# Altium PCB LEDCube.PcbDoc
Units mil, origin at the board's own origin, x right, y up, seen from the top; angles counter-clockwise.
Board outline 5865.01 x 3595.01 mil, 2 copper layers (Top Layer, Bottom Layer); 85 components, 156 nets, 364 pads, 4 vias.
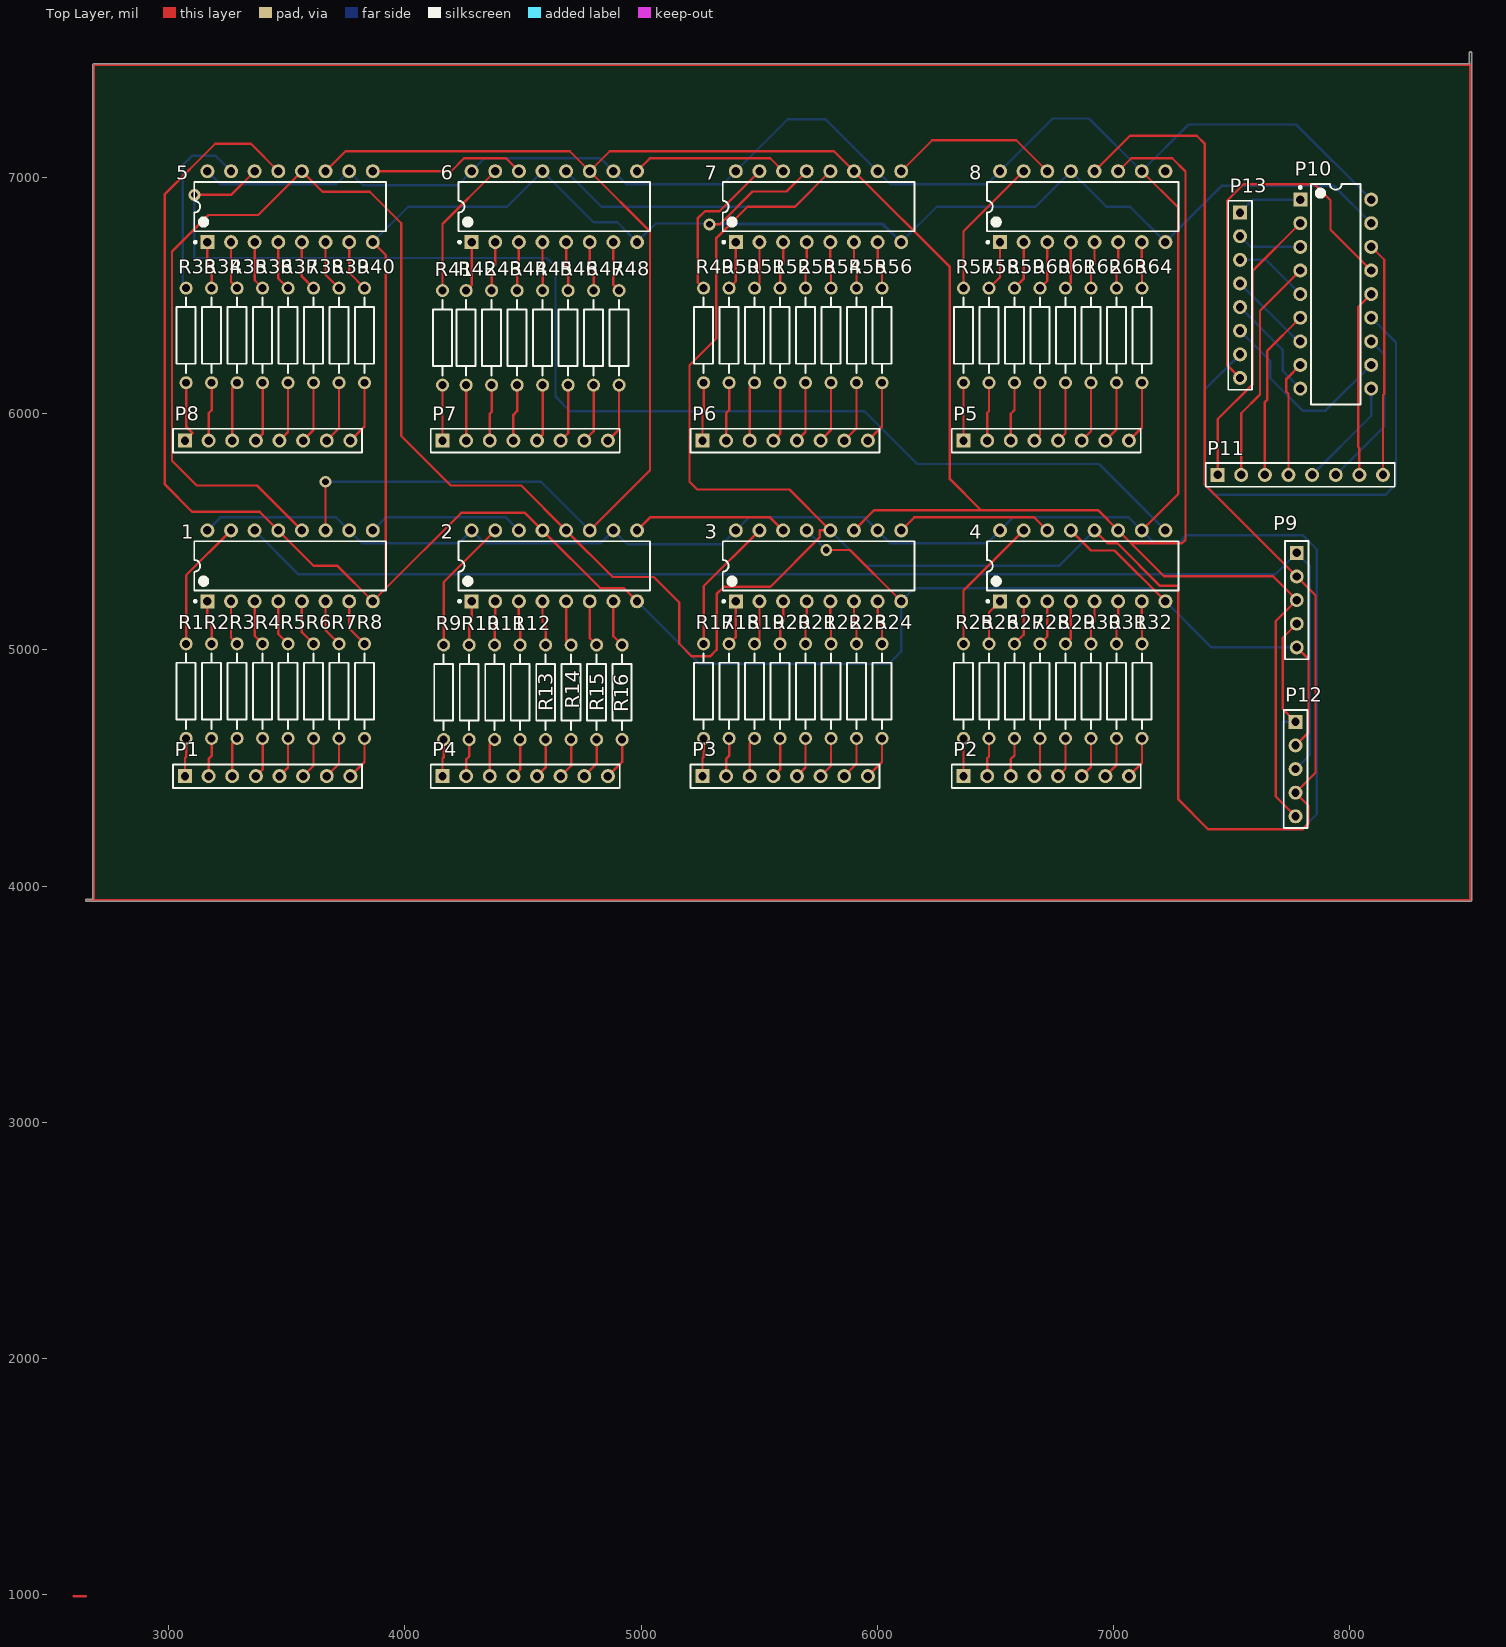
[diagram p0: Top Layer view]
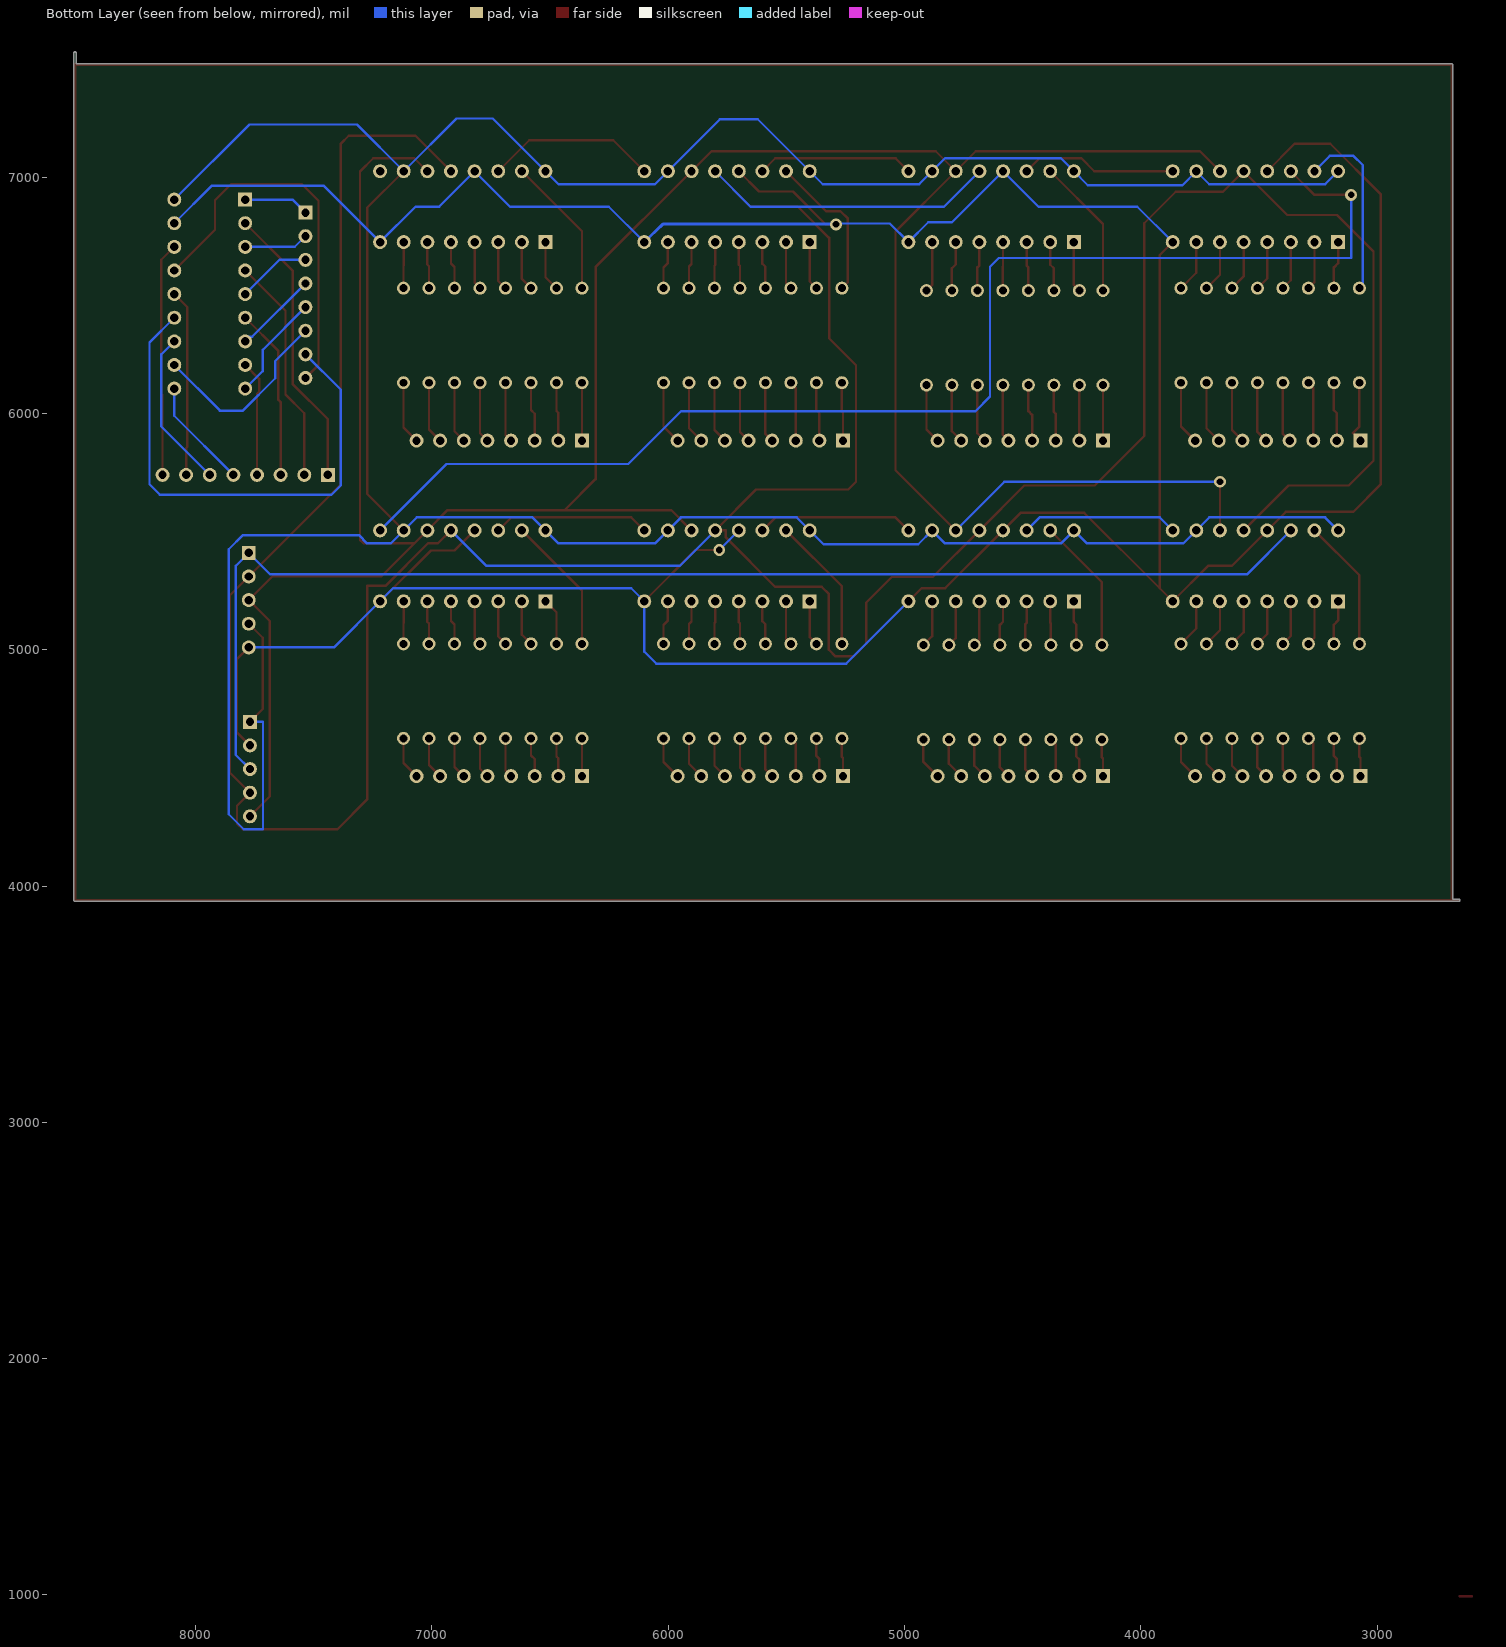
[diagram p1: Bottom Layer view, seen from below]

## Layer stack, top to bottom
Top Solder: solder mask 0.4, Solder Resist, Dk 3.5
Top Layer: signal copper 1.4
Dielectric 1: dielectric 12.6, FR-4, Dk 4.8
Bottom Layer: signal copper 1.4
Bottom Solder: solder mask 0.4, Solder Resist, Dk 3.5

## Board outline
2655,3934.99 cw(c2655,3940) 2655,3945.01 2679.99,3945.01 2679.99,7475 cw(c2685,7475) 2685,7480.02 8504.99,7480.02 8504.99,7525 cw(c8510,7525) 8515.01,7525 8515.01,3940 cw(c8510,3940) 8510,3934.99

## Design rules (kind name [scope] priority, off if disabled: settings)
Clearance [All] p1: gap=20
PolygonConnect [All] p1: connectstyle=Relief reliefconductorwidth=10 reliefentries=4 polygonreliefangle="90 Angle" airgapwidth=10
RoomDefinition LEDCube [InComponentClass('LEDCube')] p1: confinementstyle=ConfineIn formatcopy=TRUE lockcomponents=FALSE outline 0,0 2000,0 2000,1000 0,1000
RoutingVias [All] p1: holewidth=28 width=50 viastyle="Through Hole" minholewidth=28 minwidth=50 maxholewidth=28 maxwidth=50
SolderMaskExpansion [All] p1: expansion=4
Width [All] p1: maxlimit=10 minlimit=10 preferedwidth=10
30 further rules are at their usual default settings.

## Components (designator, comment, footprint, x,y, rotation, side; value= is the part's Value field where it differs from the comment)
1 "74HC595" DIP-16 3515,5355 r90 top
2 "74HC595" DIP-16 4633.1,5355 r90 top
3 "74HC595" DIP-16 5751.19,5355 r90 top
4 "74HC595" DIP-16 6869.29,5355 r90 top
5 "74HC595" DIP-16 3515,6875 r90 top
6 "74HC595" DIP-16 4633.1,6875 r90 top
7 "74HC595" DIP-16 5751.19,6875 r90 top
8 "74HC595" DIP-16 6869.29,6875 r90 top
P1 "Header 8" HDR1X8 3070,4465 r0 top
P2 "Header 8" HDR1X8 6365,4465 r0 top
P3 "Header 8" HDR1X8 5260,4465 r0 top
P4 "Header 8" HDR1X8 4160,4465 r0 top
P5 "Header 8" HDR1X8 6365,5885 r0 top
P6 "Header 8" HDR1X8 5260,5885 r0 top
P7 "Header 8" HDR1X8 4160,5885 r0 top
P8 "Header 8" HDR1X8 3070,5885 r0 top
P9 "Header 5" HDR1X5 7775,5410 r270 top
P10 "Darlinton transistorLeftToAVR" DIP-18 7940,6505 r0 top
P11 "Cube Layer" HDR1X8 7440,5740 r0 top
P12 "Matrix" HDR1X5 7770,4695 r270 top
P13 "AVR" HDR1X8 7535,6850 r270 top
R1 "Res2" AXIAL-0.4 3074.88,4825 r270 top
R2 "Res2" AXIAL-0.4 3182.76,4825 r270 top
R3 "Res2" AXIAL-0.4 3290.63,4825 r270 top
R4 "Res2" AXIAL-0.4 3398.5,4825 r270 top
R5 "Res2" AXIAL-0.4 3506.38,4825 r270 top
R6 "Res2" AXIAL-0.4 3614.25,4825 r270 top
R7 "Res2" AXIAL-0.4 3722.13,4825 r270 top
R8 "Res2" AXIAL-0.4 3830,4825 r270 top
R9 "Res2" AXIAL-0.4 4164.88,4820 r270 top
R10 "Res2" AXIAL-0.4 4272.76,4820 r270 top
R11 "Res2" AXIAL-0.4 4380.63,4820 r270 top
R12 "Res2" AXIAL-0.4 4488.5,4820 r270 top
R13 "Res2" AXIAL-0.4 4596.38,4820 r270 top
R14 "Res2" AXIAL-0.4 4704.25,4820 r270 top
R15 "Res2" AXIAL-0.4 4812.13,4820 r270 top
R16 "Res2" AXIAL-0.4 4920,4820 r270 top
R17 "Res2" AXIAL-0.4 5264.88,4825 r270 top
R18 "Res2" AXIAL-0.4 5372.76,4825 r270 top
R19 "Res2" AXIAL-0.4 5480.63,4825 r270 top
R20 "Res2" AXIAL-0.4 5588.5,4825 r270 top
R21 "Res2" AXIAL-0.4 5696.38,4825 r270 top
R22 "Res2" AXIAL-0.4 5804.25,4825 r270 top
R23 "Res2" AXIAL-0.4 5912.13,4825 r270 top
R24 "Res2" AXIAL-0.4 6020,4825 r270 top
R25 "Res2" AXIAL-0.4 6364.88,4825 r270 top
R26 "Res2" AXIAL-0.4 6472.76,4825 r270 top
R27 "Res2" AXIAL-0.4 6580.63,4825 r270 top
R28 "Res2" AXIAL-0.4 6688.5,4825 r270 top
R29 "Res2" AXIAL-0.4 6796.38,4825 r270 top
R30 "Res2" AXIAL-0.4 6904.25,4825 r270 top
R31 "Res2" AXIAL-0.4 7012.13,4825 r270 top
R32 "Res2" AXIAL-0.4 7120,4825 r270 top
R33 "Res2" AXIAL-0.4 3074.88,6330 r90 top
R34 "Res2" AXIAL-0.4 3182.76,6330 r90 top
R35 "Res2" AXIAL-0.4 3290.63,6330 r90 top
R36 "Res2" AXIAL-0.4 3398.5,6330 r90 top
R37 "Res2" AXIAL-0.4 3506.38,6330 r90 top
R38 "Res2" AXIAL-0.4 3614.25,6330 r90 top
R39 "Res2" AXIAL-0.4 3722.13,6330 r90 top
R40 "Res2" AXIAL-0.4 3830,6330 r90 top
R41 "Res2" AXIAL-0.4 4160,6320 r90 top
R42 "Res2" AXIAL-0.4 4259.88,6320 r90 top
R43 "Res2" AXIAL-0.4 4367.76,6320 r90 top
R44 "Res2" AXIAL-0.4 4475.63,6320 r90 top
R45 "Res2" AXIAL-0.4 4583.5,6320 r90 top
R46 "Res2" AXIAL-0.4 4691.38,6320 r90 top
R47 "Res2" AXIAL-0.4 4799.25,6320 r90 top
R48 "Res2" AXIAL-0.4 4907.13,6320 r90 top
R49 "Res2" AXIAL-0.4 5264.88,6330 r90 top
R50 "Res2" AXIAL-0.4 5372.76,6330 r90 top
R51 "Res2" AXIAL-0.4 5480.63,6330 r90 top
R52 "Res2" AXIAL-0.4 5588.5,6330 r90 top
R53 "Res2" AXIAL-0.4 5696.38,6330 r90 top
R54 "Res2" AXIAL-0.4 5804.25,6330 r90 top
R55 "Res2" AXIAL-0.4 5912.13,6330 r90 top
R56 "Res2" AXIAL-0.4 6020,6330 r90 top
R57 "Res2" AXIAL-0.4 6364.88,6330 r90 top
R58 "Res2" AXIAL-0.4 6472.76,6330 r90 top
R59 "Res2" AXIAL-0.4 6580.63,6330 r90 top
R60 "Res2" AXIAL-0.4 6688.5,6330 r90 top
R61 "Res2" AXIAL-0.4 6796.38,6330 r90 top
R62 "Res2" AXIAL-0.4 6904.25,6330 r90 top
R63 "Res2" AXIAL-0.4 7012.13,6330 r90 top
R64 "Res2" AXIAL-0.4 7120,6330 r90 top

## Footprints (in the part's own frame and the unit in brackets; to place one, negate y for a bottom-side part, rotate by r counter-clockwise, add the part's x,y. Pads: shape width x height; smd on the part's side, far side on the other; paste and mask are expansions set on the pad)
AXIAL-0.4 [mm] "Axial Device, Thru-Hole; 2 Leads; 0.4 in Pin Spacing"
  round 1.4 hole 0.85: 1(-5.08,0) 2(5.08,0)
  silkscreen extent -4.06,-1.02 4.06,1.02
DIP-16 [mm] "DIP; 16 Leads; Row Spacing 7.62 mm; Pitch 2.54 mm"
  rect 1.5x1.5 hole 0.9: 1(-3.81,8.89)
  round 1.5 hole 0.9: 2(-3.81,6.35) 3(-3.81,3.81) 4(-3.81,1.27) 5(-3.81,-1.27) 6(-3.81,-3.81) 7(-3.81,-6.35) 8(-3.81,-8.89) 9(3.81,-8.89) 10(3.81,-6.35) 11(3.81,-3.81) 12(3.81,-1.27) 13(3.81,1.27) 14(3.81,3.81) 15(3.81,6.35) 16(3.81,8.89)
  silkscreen extent -3.93,-10.3 2.65,10.31, body extent -3.6,-10.28 3.6,10.28, height 5.08
DIP-18 [mm] "DIP; 18 Leads; Row Spacing 7.62 mm; Pitch 2.54 mm"
  rect 1.5x1.5 hole 0.9: 1(-3.81,10.16)
  round 1.5 hole 0.9: 2(-3.81,7.62) 3(-3.81,5.08) 4(-3.81,2.54) 5(-3.81,0) 6(-3.81,-2.54) 7(-3.81,-5.08) 8(-3.81,-7.62) 9(-3.81,-10.16) 10(3.81,-10.16) 11(3.81,-7.62) 12(3.81,-5.08) 13(3.81,-2.54) 14(3.81,0) 15(3.81,2.54) 16(3.81,5.08) 17(3.81,7.62) 18(3.81,10.16)
  silkscreen extent -3.93,-11.85 2.65,11.85, body extent -3.6,-11.8 3.6,11.8, height 5.08
HDR1X5 [mm] "Connector; Header; 5 Position"
  rect 1.5x1.5 hole 0.9: 1(0,0)
  round 1.5 hole 0.9: 2(2.54,0) 3(5.08,0) 4(7.62,0) 5(10.16,0)
  silkscreen extent -1.27,-1.27 11.43,1.27
HDR1X8 [mm] "Connector; Header; 8 Position"
  rect 1.5x1.5 hole 0.9: 1(0,0)
  round 1.5 hole 0.9: 2(2.54,0) 3(5.08,0) 4(7.62,0) 5(10.16,0) 6(12.7,0) 7(15.24,0) 8(17.78,0)
  silkscreen extent -1.27,-1.27 19.05,1.27

## Part data
1 2 3 4 5 6 7 8: library part Component_1
P1 P2 P3 P4 P5 P6 P7 P8: "Header, 8-Pin"
P9: "Header, 5-Pin"
P10: library part "Header 9X2", "Header, 9-Pin, Dual row"
P11 P13: library part "Header 8", "Header, 8-Pin"
P12: library part "Header 5", "Header, 5-Pin"
R1 R2 R3 R4 R5 R6 R7 R8 R9 R10 R11 R12 R13 R14 R15 R16 R17 R18 R19 R20 R21 R22 R23 R24 R25 R26 R27 R28 R29 R30 R31 R32 R33 R34 R35 R36 R37 R38 R39 R40 R41 R42 R43 R44 R45 R46 R47 R48 R49 R50 R51 R52 R53 R54 R55 R56 R57 R58 R59 R60 R61 R62 R63 R64: "Resistor"

## Via types
v1: diameter 50, hole 28, Top Layer to Bottom Layer, 4 vias

## Nets (pads, with @x,y where several pads share a name; then routed paths per layer and width w, separated by ;. In a path a pad name is that pad's centre, name@x,y a point inside that pad or via, vN(x,y) a via of type N, cw(c..) or ccw(c..) an arc to the next point about the centre after c; other vN are vias at no path point)
Net1_1: 1.1 R2.1 | length 187.4
  Top Layer w10: 1.1 3165,5123.76 3182.76,5106 R2.1
Net1_2: 1.2 R3.1 | length 190.6
  Top Layer w10: 1.2 3265,5050.63 R3.1
Net1_3: 1.3 R4.1 | length 193.9
  Top Layer w10: 1.3 3365,5058.5 R4.1
Net1_4: 1.4 R5.1 | length 197.1
  Top Layer w10: 1.4 3465,5066.38 R5.1
Net1_5: 1.5 R6.1 | length 200.4
  Top Layer w10: 1.5 3565,5074.25 R6.1
Net1_6: 1.6 R7.1 | length 203.7
  Top Layer w10: 1.6 3665,5082.13 R7.1
Net1_7: 1.7 R8.1 | length 206.9
  Top Layer w10: 1.7 3765,5090 R8.1
Net1_8: 1.8 1.13 2.8 2.13 3.8 3.13 4.8 4.13 5.8 5.13 6.8 6.13 7.8 7.13 8.8 8.13 P9.5 P10.17 P12.2 | length 16913
  Top Layer w10: 5.13 3349,7141 3198,7141 2985,6928 2985,5699 3100,5584 3386,5584 1.13 3615,5355 3715,5355 1.8 3920,5260 ; 5.8 3920,6670 3920,5260 ; 2.8 4928.1,5260 4828.1,5260 2.13 4509.1,5579 4239,5579 3920,5260 ; v1(5290,6800) 5333,6800 5472,6939 5615.19,6939 7.13 ; v1(5784.19,5422) 5884.19,5422 3.8 ; 4.13 6904.29,5420 7004.29,5420 4.8 ; P12.2 7824.53,4649.53 7824.53,4960.47 P9.5
  Bottom Layer w10: 5.8 4015,6875 4433.1,6875 6.13 4799.1,6809 4899.1,6809 6.8 5062.1,6804 6022.19,6804 6022.19,6800 ; 2.8 5247.1,4941 6050,4941 6101.19,4992.19 3.8 6156.19,5260 7164.29,5260 4.8 7414.29,5010 P9.5 ; v1(5290,6800) 6022.19,6800 ; 3.13 v1(5784.19,5422) ; P10.17 7932.21,6962.79 7457.07,6962.79 8.8 7069.29,6875 6969.29,6875 8.13 6669.29,6875 6251.19,6875 7.8 ; 6022.19,6800 6026.19,6800 7.8 ; 6022.19,6800 7.8
Net1_9: 1.9 2.14 | length 663.7
  Bottom Layer w10: 1.9 3920,5560 4428.1,5560 2.14
Net1_10: 1.10 1.16 2.10 2.16 3.10 3.16 4.10 4.16 5.10 5.16 6.10 6.16 7.10 7.16 8.10 8.16 P9.4 P10.18 P12.1 | length 14728.7
  Top Layer w10: 4.10 7274,5659.71 7274,6870.29 8.10 ; P12.1 7716,4749 7716,5051 P9.4
  Bottom Layer w10: 1.16 3220,5560 3710,5560 1.10 3820,5450 4228.1,5450 2.16 4338.1,5450 4828.1,5450 2.10 4942.1,5446 5342.19,5446 3.16 5456.19,5560 5946.19,5560 3.10 6056.19,5450 6464.29,5450 4.16 6574.29,5560 7064.29,5560 4.10 7174.29,5450 7274,5450 7309,5485 7800,5485 7860,5425 7860,4304 7796,4240 7715,4240 7715,4695 P12.1 ; 5.16 3220,6970 3710,6970 5.10 3824,6966 4224.1,6966 6.16 4338.1,7080 4828.1,7080 6.10 4938.1,6970 5346.19,6970 7.16 5621.19,7245 5781.19,7245 7.10 6056.19,6970 6464.29,6970 8.16 6742.29,7248 6896.29,7248 8.10 7317.29,7223 7772,7223 P10.18
Net1_11: 1.11 2.11 3.11 4.11 5.11 6.11 7.11 8.11 P9.3 P12.5 | length 12352.9
  Top Layer w10: 1.11 v1(3665,5711) ; 5.11 3749.53,7109.53 4698.57,7109.53 6.11 ; 2.11 5038,5759.9 5038,6770.1 6.11 ; 3.11 5987.19,5591 6438,5591 ; 8.11 7074.29,7080 7248,7080 7304,7024 7304,5465 7289.31,5450.31 7073.97,5450.31 ; P12.5 7686,4379 7686,5121 P9.3 7674,5311 7213.29,5311 7073.97,5450.31 ; 6.11 4867.62,7109.53 5816.66,7109.53 7.11 6307,6619.19 6307,5722 6438,5591 ; 6438,5591 6933.29,5591 4.11 7073.97,5450.31
  Bottom Layer w10: v1(3665,5711) 4577.1,5711 2.11
Net1_12: 1.12 2.12 3.12 4.12 5.12 6.12 7.12 8.12 P9.2 P12.4 | length 16825.9
  Top Layer w10: 1.12 3375,5695 3120,5695 3015,5800 3015,6685 3170,6840 3380,6840 5.12 3652,6938 3852,6938 3985,6805 3985,5905 4195,5695 4493.1,5695 2.12 4880.1,5308 5054,5308 5162,5200 5162,5025 5215,4972 5292,4972 5320,5000 5320,5236 5350,5266 5547,5266 5756,5475 5756,5505 3.12 5628.19,5678 5238,5678 5205,5711 5205,6204 5319,6318 5319,6743 5451,6875 5651.19,6875 7.12 ; 4.12 6973.86,5450.42 7016.29,5450.42 7196.48,5270.24 7274,5270.24 7274,4366 7400,4240 7800,4240 7825,4265 7825,4340 P12.4 7854.53,4479.53 7854.53,5230.47 P9.2 7385,5700 7385,7142 7352,7175 7069.29,7175 8.12
  Bottom Layer w10: 6.12 4833.1,6875 5651.19,6875 7.12 ; 3.12 5951.19,5355 6769.29,5355 4.12
Net1_14: 1.14 P9.1 P12.3 | length 5487.4
  Bottom Layer w10: 1.14 3551,5319 7684,5319 P9.1 7830,5355 7830,4555 P12.3
Net1_15: 1.15 R1.1 | length 558.7
  Top Layer w10: R1.1 3074.88,5314.88 1.15
Net2_1: 2.1 R10.1 | length 189.3
  Top Layer w10: R10.1 4272.76,5107 4283.1,5117.34 2.1
Net2_2: 2.2 R11.1 | length 186
  Top Layer w10: R11.1 4380.63,5111 4383.1,5113.47 2.2
Net2_3: 2.3 R12.1 | length 187.2
  Top Layer w10: 2.3 4483.1,5114.41 4488.5,5109 R12.1
Net2_4: 2.4 R13.1 | length 190.5
  Top Layer w10: 2.4 4583.1,5118.28 4596.38,5105 R13.1
Net2_5: 2.5 R14.1 | length 193.8
  Top Layer w10: 2.5 4683.1,5041.16 R14.1
Net2_6: 2.6 R15.1 | length 197
  Top Layer w10: 2.6 4783.1,5049.03 R15.1
Net2_7: 2.7 R16.1 | length 200.3
  Top Layer w10: 2.7 4883.1,5056.9 R16.1
Net2_9: 2.9 3.14 | length 663.7
  Top Layer w10: 2.9 5038.1,5560 5546.19,5560 3.14
Net2_15: 2.15 R9.1 | length 575.4
  Top Layer w10: R9.1 4164.88,5286.79 2.15
Net3_1: 3.1 R18.1 | length 191.8
  Top Layer w10: R18.1 5401.19,5053.43 3.1
Net3_2: 3.2 R19.1 | length 188.5
  Top Layer w10: R19.1 5501.19,5045.56 3.2
Net3_3: 3.3 R20.1 | length 185.3
  Top Layer w10: R20.1 5588.5,5108 5601.19,5120.69 3.3
Net3_4: 3.4 R21.1 | length 182
  Top Layer w10: R21.1 5696.38,5112 5701.19,5116.81 3.4
Net3_5: 3.5 R22.1 | length 181.3
  Top Layer w10: 3.5 5801.19,5116.06 5804.25,5113 R22.1
Net3_6: 3.6 R23.1 | length 184.5
  Top Layer w10: 3.6 5901.19,5119.94 5912.13,5109 R23.1
Net3_7: 3.7 R24.1 | length 187.8
  Top Layer w10: 3.7 6001.19,5123.81 6020,5105 R24.1
Net3_9: 3.9 4.14 | length 663.7
  Top Layer w10: 3.9 6156.19,5560 6664.29,5560 4.14
Net3_15: 3.15 R17.1 | length 577.9
  Top Layer w10: R17.1 5264.88,5268.69 3.15
Net4_1: 4.1 R26.1 | length 199.3
  Top Layer w10: R26.1 6472.76,5158.47 4.1
Net4_2: 4.2 R27.1 | length 196
  Top Layer w10: R27.1 6619.29,5063.66 4.2
Net4_3: 4.3 R28.1 | length 192.8
  Top Layer w10: R28.1 6719.29,5055.78 4.3
Net4_4: 4.4 R29.1 | length 189.5
  Top Layer w10: R29.1 6819.29,5047.91 4.4
Net4_5: 4.5 R30.1 | length 186.2
  Top Layer w10: R30.1 6904.25,5107 6919.29,5122.03 4.5
Net4_6: 4.6 R31.1 | length 183
  Top Layer w10: R31.1 7012.13,5111 7019.29,5118.16 4.6
Net4_7: 4.7 R32.1 | length 180.3
  Top Layer w10: 4.7 7119.29,5114.71 7120,5114 R32.1
Net4_9: 4.9 5.14 | length 5472.5
  Top Layer w10: v1(3110,6925) 3265,6925 5.14
  Bottom Layer w10: v1(3110,6925) 3110,6658 4601,6658 4638,6621 4638,6071 4700,6009 5946,6009 6169,5786 6938.29,5786 4.9
Net4_15: 4.15 R25.1 | length 585.4
  Top Layer w10: R25.1 6364.88,5250.6 4.15
Net5_1: 5.1 R34.2 | length 202.4
  Top Layer w10: 5.1 3165,6635.76 3182.76,6618 R34.2
Net5_2: 5.2 R35.2 | length 205.6
  Top Layer w10: 5.2 3265,6555.63 R35.2
Net5_3: 5.3 R36.2 | length 208.9
  Top Layer w10: 5.3 3365,6563.5 R36.2
Net5_4: 5.4 R37.2 | length 212.1
  Top Layer w10: 5.4 3465,6571.38 R37.2
Net5_5: 5.5 R38.2 | length 215.4
  Top Layer w10: 5.5 3565,6579.25 R38.2
Net5_6: 5.6 R39.2 | length 218.7
  Top Layer w10: 5.6 3665,6587.13 R39.2
Net5_7: 5.7 R40.2 | length 221.9
  Top Layer w10: 5.7 3765,6595 R40.2
Net5_9: 5.9 6.14 | length 663.3
  Top Layer w10: 5.9 4197,7025 4251.53,7079.53 4428.57,7079.53 6.14
Net5_15: 5.15 R33.2 | length 783.4
  Bottom Layer w10: R33.2 3060,6530 3060,7050 3100,7090 3200,7090 5.15
Net6_1: 6.1 R42.2 | length 214.6
  Top Layer w10: R42.2 4283.1,6543.21 6.1
Net6_2: 6.2 R43.2 | length 211.4
  Top Layer w10: R43.2 4367.76,6614 4383.1,6629.34 6.2
Net6_3: 6.3 R44.2 | length 208.1
  Top Layer w10: R44.2 4475.63,6618 4483.1,6625.47 6.3
Net6_4: 6.4 R45.2 | length 205.2
  Top Layer w10: 6.4 4583.1,6622.41 4583.5,6622 R45.2
Net6_5: 6.5 R46.2 | length 208.4
  Top Layer w10: 6.5 4683.1,6626.28 4691.38,6618 R46.2
Net6_6: 6.6 R47.2 | length 211.7
  Top Layer w10: 6.6 4783.1,6630.16 4799.25,6614 R47.2
Net6_7: 6.7 R48.2 | length 215
  Top Layer w10: 6.7 4883.1,6544.03 R48.2
Net6_9: 6.9 7.14 | length 663.3
  Top Layer w10: 6.9 5037.62,7079.53 5546.66,7079.53 7.14
Net6_15: 6.15 R41.2 | length 597.4
  Top Layer w10: R41.2 4160,6801.9 6.15
Net7_1: 7.1 R50.2 | length 206.8
  Top Layer w10: R50.2 5401.19,6558.43 7.1
Net7_2: 7.2 R51.2 | length 203.5
  Top Layer w10: R51.2 5501.19,6550.56 7.2
Net7_3: 7.3 R52.2 | length 200.3
  Top Layer w10: R52.2 5588.5,6621 5601.19,6633.69 7.3
Net7_4: 7.4 R53.2 | length 197
  Top Layer w10: R53.2 5696.38,6625 5701.19,6629.81 7.4
Net7_5: 7.5 R54.2 | length 196.3
  Top Layer w10: 7.5 5801.19,6628.06 5804.25,6625 R54.2
Net7_6: 7.6 R55.2 | length 199.5
  Top Layer w10: 7.6 5901.19,6632.94 5912.13,6622 R55.2
Net7_7: 7.7 R56.2 | length 202.8
  Top Layer w10: 7.7 6001.19,6636.81 6020,6618 R56.2
Net7_9: 7.9 8.14 | length 726.6
  Top Layer w10: 7.9 6232.19,7156 6588.29,7156 8.14
Net7_15: 7.15 R49.2 | length 649.8
  Top Layer w10: R49.2 5239.66,6555.22 5239.66,6825 5270.6,6855.94 5332.13,6855.94 7.15
Net8_1: 8.1 R58.2 | length 214.3
  Top Layer w10: R58.2 6519.29,6576.53 8.1
Net8_2: 8.2 R59.2 | length 211
  Top Layer w10: R59.2 6619.29,6568.66 8.2
Net8_3: 8.3 R60.2 | length 207.8
  Top Layer w10: R60.2 6719.29,6560.78 8.3
Net8_4: 8.4 R61.2 | length 204.5
  Top Layer w10: R61.2 6819.29,6552.91 8.4
Net8_5: 8.5 R62.2 | length 201.2
  Top Layer w10: R62.2 6904.25,6619 6919.29,6634.03 8.5
Net8_6: 8.6 R63.2 | length 198
  Top Layer w10: R63.2 7012.13,6623 7019.29,6630.16 8.6
Net8_7: 8.7 R64.2 | length 195.3
  Top Layer w10: 8.7 7119.29,6627.71 7120,6627 R64.2
Net8_15: 8.15 R57.2 | length 600.4
  Top Layer w10: R57.2 6364.88,6770.6 8.15
NetP1_1: P1.1 R1.2 | length 162
  Top Layer w10: P1.1 3070,4542 3074.88,4546.88 R1.2
NetP1_2: P1.2 R2.2 | length 165.3
  Top Layer w10: P1.2 3170,4538 3182.76,4550.76 R2.2
NetP1_3: P1.3 R3.2 | length 168.5
  Top Layer w10: P1.3 3270,4604.37 R3.2
NetP1_4: P1.4 R4.2 | length 171.8
  Top Layer w10: P1.4 3398.5,4493.5 R4.2
NetP1_5: P1.5 R5.2 | length 175.1
  Top Layer w10: P1.5 3506.38,4501.38 R5.2
NetP1_6: P1.6 R6.2 | length 178.3
  Top Layer w10: P1.6 3614.25,4509.25 R6.2
NetP1_7: P1.7 R7.2 | length 181.6
  Top Layer w10: P1.7 3722.13,4517.13 R7.2
NetP1_8: P1.8 R8.2 | length 184.9
  Top Layer w10: P1.8 3830,4525 R8.2
NetP2_1: P2.1 R25.2 | length 160
  Top Layer w10: R25.2 6364.88,4544.12 6365,4544 P2.1
NetP2_2: P2.2 R26.2 | length 163.2
  Top Layer w10: P2.2 6465,4541 6472.76,4548.76 R26.2
NetP2_3: P2.3 R27.2 | length 166.5
  Top Layer w10: P2.3 6565,4537 6580.63,4552.63 R27.2
NetP2_4: P2.4 R28.2 | length 169.7
  Top Layer w10: P2.4 6688.5,4488.5 R28.2
NetP2_5: P2.5 R29.2 | length 173
  Top Layer w10: P2.5 6796.38,4496.38 R29.2
NetP2_6: P2.6 R30.2 | length 176.3
  Top Layer w10: P2.6 6904.25,4504.25 R30.2
NetP2_7: P2.7 R31.2 | length 179.5
  Top Layer w10: P2.7 7012.13,4512.13 R31.2
NetP2_8: P2.8 R32.2 | length 182.8
  Top Layer w10: P2.8 7120,4520 R32.2
NetP3_1: P3.1 R17.2 | length 162
  Top Layer w10: P3.1 5260,4542 5264.88,4546.88 R17.2
NetP3_2: P3.2 R18.2 | length 165.3
  Top Layer w10: P3.2 5360,4538 5372.76,4550.76 R18.2
NetP3_3: P3.3 R19.2 | length 168.5
  Top Layer w10: P3.3 5460,4604.37 R19.2
NetP3_4: P3.4 R20.2 | length 171.8
  Top Layer w10: P3.4 5588.5,4493.5 R20.2
NetP3_5: P3.5 R21.2 | length 175.1
  Top Layer w10: P3.5 5696.38,4501.38 R21.2
NetP3_6: P3.6 R22.2 | length 178.3
  Top Layer w10: P3.6 5804.25,4509.25 R22.2
NetP3_7: P3.7 R23.2 | length 181.6
  Top Layer w10: P3.7 5912.13,4517.13 R23.2
NetP3_8: P3.8 R24.2 | length 184.9
  Top Layer w10: P3.8 6020,4525 R24.2
NetP4_1: P4.1 R9.2 | length 157
  Top Layer w10: P4.1 4160,4540 4164.88,4544.88 R9.2
NetP4_2: P4.2 R10.2 | length 160.3
  Top Layer w10: P4.2 4260,4536 4272.76,4548.76 R10.2
NetP4_3: P4.3 R11.2 | length 163.5
  Top Layer w10: P4.3 4360,4599.37 R11.2
NetP4_4: P4.4 R12.2 | length 166.8
  Top Layer w10: P4.4 4488.5,4493.5 R12.2
NetP4_5: P4.5 R13.2 | length 170.1
  Top Layer w10: P4.5 4596.38,4501.38 R13.2
NetP4_6: P4.6 R14.2 | length 173.3
  Top Layer w10: P4.6 4704.25,4509.25 R14.2
NetP4_7: P4.7 R15.2 | length 176.6
  Top Layer w10: P4.7 4812.13,4517.13 R15.2
NetP4_8: P4.8 R16.2 | length 179.9
  Top Layer w10: P4.8 4920,4525 R16.2
NetP5_1: P5.1 R57.1 | length 245
  Top Layer w10: R57.1 6364.88,6007.12 6365,6007 P5.1
NetP5_2: P5.2 R58.1 | length 248.2
  Top Layer w10: P5.2 6465,6003 6472.76,6010.76 R58.1
NetP5_3: P5.3 R59.1 | length 251.5
  Top Layer w10: P5.3 6565,5999 6580.63,6014.63 R59.1
NetP5_4: P5.4 R60.1 | length 254.7
  Top Layer w10: P5.4 6688.5,5908.5 R60.1
NetP5_5: P5.5 R61.1 | length 258
  Top Layer w10: P5.5 6796.38,5916.38 R61.1
NetP5_6: P5.6 R62.1 | length 261.3
  Top Layer w10: P5.6 6904.25,5924.25 R62.1
NetP5_7: P5.7 R63.1 | length 264.5
  Top Layer w10: P5.7 7012.13,5932.13 R63.1
NetP5_8: P5.8 R64.1 | length 267.8
  Top Layer w10: P5.8 7120,5940 R64.1
NetP6_1: P6.1 R49.1 | length 247
  Top Layer w10: P6.1 5260,6005 5264.88,6009.88 R49.1
NetP6_2: P6.2 R50.1 | length 250.3
  Top Layer w10: P6.2 5360,6001 5372.76,6013.76 R50.1
NetP6_3: P6.3 R51.1 | length 253.5
  Top Layer w10: P6.3 5460,6109.37 R51.1
NetP6_4: P6.4 R52.1 | length 256.8
  Top Layer w10: P6.4 5588.5,5913.5 R52.1
NetP6_5: P6.5 R53.1 | length 260.1
  Top Layer w10: P6.5 5696.38,5921.38 R53.1
NetP6_6: P6.6 R54.1 | length 263.3
  Top Layer w10: P6.6 5804.25,5929.25 R54.1
NetP6_7: P6.7 R55.1 | length 266.6
  Top Layer w10: P6.7 5912.13,5937.13 R55.1
NetP6_8: P6.8 R56.1 | length 269.9
  Top Layer w10: P6.8 6020,5945 R56.1
NetP7_1: P7.1 R41.1 | length 235
  Top Layer w10: P7.1 R41.1
NetP7_2: P7.2 R42.1 | length 235
  Top Layer w10: R42.1 4259.88,6002.12 4260,6002 P7.2
NetP7_3: P7.3 R43.1 | length 238.2
  Top Layer w10: P7.3 4360,5998 4367.76,6005.76 R43.1
NetP7_4: P7.4 R44.1 | length 241.5
  Top Layer w10: P7.4 4460,5994 4475.63,6009.63 R44.1
NetP7_5: P7.5 R45.1 | length 244.7
  Top Layer w10: P7.5 4583.5,5908.5 R45.1
NetP7_6: P7.6 R46.1 | length 248
  Top Layer w10: P7.6 4691.38,5916.38 R46.1
NetP7_7: P7.7 R47.1 | length 251.3
  Top Layer w10: P7.7 4799.25,5924.25 R47.1
NetP7_8: P7.8 R48.1 | length 254.5
  Top Layer w10: P7.8 4907.13,5932.13 R48.1
NetP8_1: P8.1 R33.1 | length 269.9
  Top Layer w10: P8.1 3102.44,5917.44 3074.88,5945 R33.1
NetP8_2: P8.2 R34.1 | length 250.3
  Top Layer w10: P8.2 3170,6001 3182.76,6013.76 R34.1
NetP8_3: P8.3 R35.1 | length 253.5
  Top Layer w10: P8.3 3270,6109.37 R35.1
NetP8_4: P8.4 R36.1 | length 256.8
  Top Layer w10: P8.4 3398.5,5913.5 R36.1
NetP8_5: P8.5 R37.1 | length 260.1
  Top Layer w10: P8.5 3506.38,5921.38 R37.1
NetP8_6: P8.6 R38.1 | length 263.3
  Top Layer w10: P8.6 3614.25,5929.25 R38.1
NetP8_7: P8.7 R39.1 | length 266.6
  Top Layer w10: P8.7 3722.13,5937.13 R39.1
NetP8_8: P8.8 R40.1 | length 269.9
  Top Layer w10: P8.8 3830,5945 R40.1
NetP10_1: P10.1 P13.1 | length 277.8
  Bottom Layer w10: P13.1 7590,6905 P10.1
NetP10_2: P10.2 P11.1 | length 1210
  Top Layer w10: P11.1 7440,5975.47 7589.53,6125 7589.53,6604.53 P10.2
NetP10_3: P10.3 P13.2 | length 273.6
  Bottom Layer w10: P13.2 7580,6705 P10.3
NetP10_4: P10.4 P11.2 | length 968.6
  Top Layer w10: P11.2 7540,6000.48 7619.53,6080.01 7619.53,6434.53 P10.4
NetP10_5: P10.5 P13.3 | length 315.1
  Bottom Layer w10: P13.3 7645,6650 P10.5
NetP10_6: P10.6 P11.3 | length 727.1
  Top Layer w10: P11.3 7640,6048.47 7649.53,6058 7649.53,6264.53 P10.6
NetP10_7: P10.7 P13.4 | length 368.2
  Bottom Layer w10: P13.4 7760,6325 7790,6325 P10.7
NetP10_8: P10.8 P11.4 | length 493.2
  Top Layer w10: P11.4 7740,6083 7731,6092 7731,6146 P10.8
NetP10_9: P10.9 P13.5 | length 450.6
  Bottom Layer w10: P13.5 7716,6269 7716,6179 P10.9
NetP10_10: P10.10 P11.5 | length 468.6
  Bottom Layer w10: P11.5 8090,5990 P10.10
NetP10_11: P10.11 P13.6 | length 817.7
  Bottom Layer w10: P13.6 7663,6222 7663,6149 7800,6012 7897,6012 P10.11
NetP10_12: P10.12 P11.6 | length 672.7
  Bottom Layer w10: P11.6 8145,5945 8145,6250 P10.12
NetP10_13: P10.13 P13.7 | length 2209.4
  Bottom Layer w10: P13.7 7385,6100 7385,5696 7425,5656 8151,5656 8195,5700 8195,6300 P10.13
NetP10_14: P10.14 P11.7 | length 789.9
  Top Layer w10: P11.7 8040,5853 8035,5858 8035,6450 P10.14
NetP10_15: P10.15 P13.8 | length 1636.2
  Top Layer w10: P13.8 7480,6205 7480,6900 7550,6970 7850,6970 7918,6902 7918,6777 P10.15
NetP10_16: P10.16 P11.8 | length 989.9
  Top Layer w10: P10.16 8145,6650 8145,6083 8140,6078 P11.8
pads on no net: 8.9
copper on no net: | length 18805
  Top Layer w10: 2600,995 2650,995 ; 2655,3940 8510,3940 8510,7480.02 ; 2685,3940 2685,7475 8510,7475